# EAGLE board display (EAGLE 9.0.1)
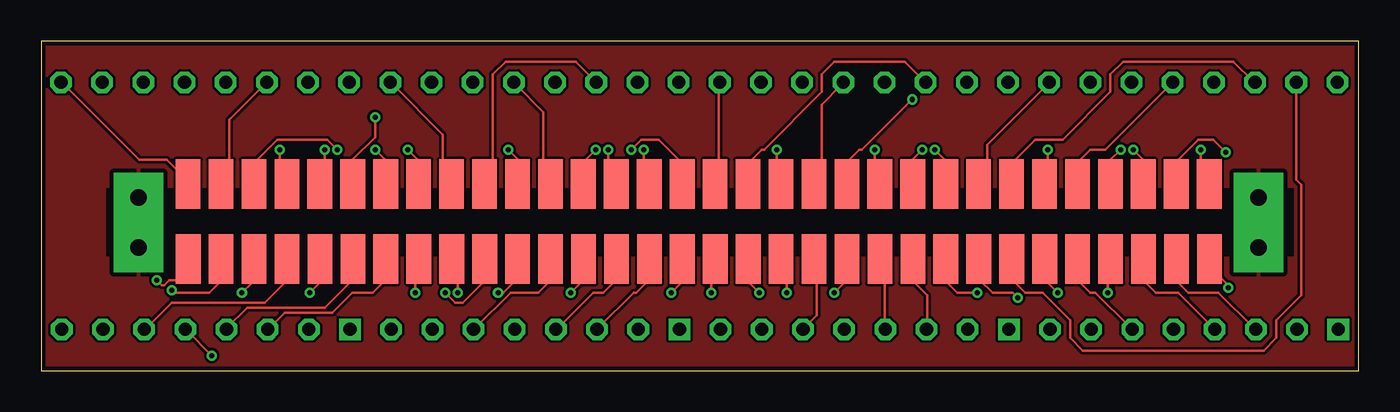
[diagram p0: board, top side]
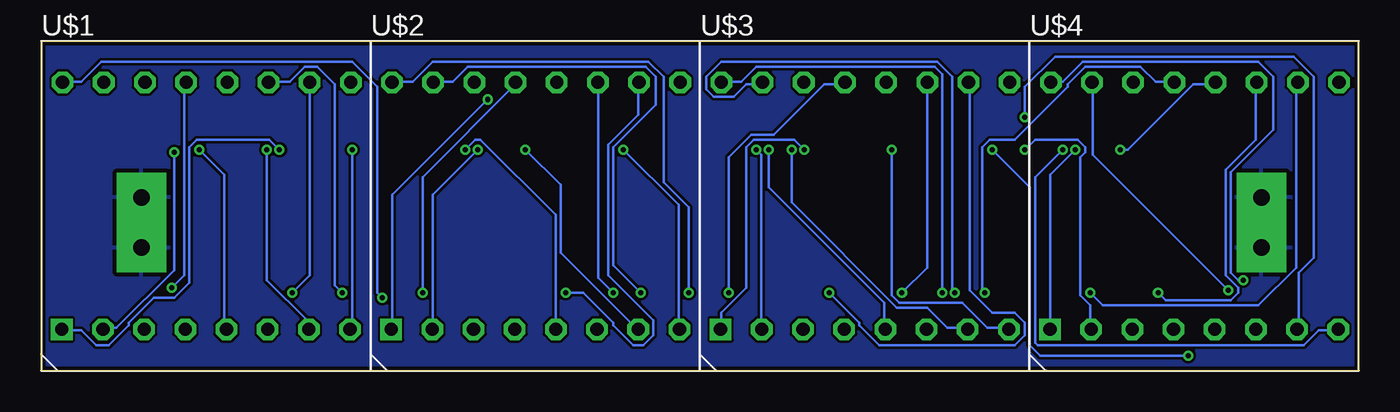
[diagram p1: board, bottom side, seen from below]

Size 80 x 20 mm. Coordinates in mm from the lower left corner, seen from the top.
Outline: 0,0 80,0 80,20 0,20 0,0
Copper layers (1*16): Top 0.035mm / dielectric 1.5mm / Bottom 0.035mm
Design rules "SeeedStudio_2layer_DRU_no_angle_20140221": minimum track width 6mil, minimum drill 12mil, track to track 6mil, track to pad 6mil, pad to pad 6mil, via to via 6mil, smd to smd 0mil, copper to edge 10mil, drill to drill 10mil, minimum pad ring 10mil, minimum via ring 6mil, stop-mask expansion 2mil, vias tented up to drill 100mil, thermal gap 10mil
tRestrict: area 4,7 to 76,11

## Footprints (pad centres in the part's own frame; a part is rotated, then mirrored left to right if it is on the bottom)
MATRIX_8X8_20MM = drill 0.8 square: P$1 1.25,2.5 | drill 0.8 octagon: P$2 3.75,2.5; P$3 6.25,2.5; P$4 8.75,2.5; P$5 11.25,2.5; P$6 13.75,2.5; P$7 16.25,2.5; P$8 18.75,2.5; P$9 18.8,17.5; P$10 16.3,17.5; P$11 13.8,17.5; P$12 11.3,17.5; P$13 8.8,17.5; P$14 6.3,17.5; P$15 3.8,17.5; P$16 1.3,17.5
ONE_SIDED = drill 1 pad 3 square: GND@1 1.564,-1.501; GND@2 69.564,-1.501; GND@3 1.564,1.547; GND@4 69.564,1.547 | smd 1.5 x 3: P$1 4.564,-2.317; P$2 6.564,-2.317; P$3 8.564,-2.317; P$4 10.564,-2.317; P$5 12.564,-2.317; P$6 14.564,-2.317; P$7 16.564,-2.317; P$8 18.564,-2.317; P$9 20.564,-2.317; P$10 22.564,-2.317; P$11 24.564,-2.317; P$12 26.564,-2.317; P$13 28.564,-2.317; P$14 30.564,-2.317; P$15 32.564,-2.317; P$16 34.564,-2.317; P$17 36.564,-2.317; P$18 38.564,-2.317; P$19 40.564,-2.317; P$20 42.564,-2.317; P$21 44.564,-2.317; P$22 46.564,-2.317; P$23 48.564,-2.317; P$24 50.564,-2.317; P$25 52.564,-2.317; P$26 54.564,-2.317; P$27 56.564,-2.317; P$28 58.564,-2.317; P$29 60.564,-2.317; P$30 62.564,-2.317; P$31 64.564,-2.317; P$32 66.564,-2.317; P$33 66.556,2.236; P$34 64.556,2.236; P$35 62.556,2.236; P$36 60.556,2.236; P$37 58.556,2.236; P$38 56.556,2.236; P$39 54.556,2.236; P$40 52.556,2.236; P$41 50.556,2.236; P$42 48.556,2.236; P$43 46.556,2.236; P$44 44.556,2.236; P$45 42.556,2.236; P$46 40.556,2.236; P$47 38.556,2.236; P$48 36.556,2.236; P$49 34.556,2.236; P$50 32.556,2.236; P$51 30.556,2.236; P$52 28.556,2.236; P$53 26.556,2.236; P$54 24.556,2.236; P$55 22.556,2.236; P$56 20.556,2.236; P$57 18.556,2.236; P$58 16.556,2.236; P$59 14.556,2.236; P$60 12.556,2.236; P$61 10.556,2.236; P$62 8.556,2.236; P$63 6.556,2.236; P$64 4.556,2.236

## Placement (x,y rotation side)
U$1  LED_8X8_MATRIX07088BH  [MATRIX_8X8_20MM]  80,0 0 bottom
U$2  LED_8X8_MATRIX07088BH  [MATRIX_8X8_20MM]  60,0 0 bottom
U$3  LED_8X8_MATRIX07088BH  [MATRIX_8X8_20MM]  40,0 0 bottom
U$4  LED_8X8_MATRIX07088BH  [MATRIX_8X8_20MM]  20,0 0 bottom
U$5  ANGLE_BOARD_CONNECTORONE_SIDED  [ONE_SIDED]  75.48,9.01 180 top

## Library data of the parts
U$1-U$4 = LED
U$5 = interboard

## Nets
GND: U$5.GND@1 U$5.GND@2 U$5.GND@3 U$5.GND@4
M1C1: U$1.P$13 U$5.P$64
M1C2: U$1.P$3 U$5.P$63
M1C3: U$1.P$4 U$5.P$62
M1C4: U$1.P$10 U$5.P$61
M1C5: U$1.P$6 U$5.P$60
M1C6: U$1.P$11 U$5.P$59
M1C7: U$1.P$15 U$5.P$58
M1C8: U$1.P$16 U$5.P$57
M1R1: U$1.P$5 U$5.P$1
M1R2: U$1.P$2 U$5.P$2
M1R3: U$1.P$7 U$5.P$3
M1R4: U$1.P$1 U$5.P$4
M1R5: U$1.P$12 U$5.P$5
M1R6: U$1.P$8 U$5.P$6
M1R7: U$1.P$14 U$5.P$7
M1R8: U$1.P$9 U$5.P$8
M2C1: U$2.P$13 U$5.P$56
M2C2: U$2.P$3 U$5.P$55
M2C3: U$2.P$4 U$5.P$54
M2C4: U$2.P$10 U$5.P$53
M2C5: U$2.P$6 U$5.P$52
M2C6: U$2.P$11 U$5.P$51
M2C7: U$2.P$15 U$5.P$50
M2C8: U$2.P$16 U$5.P$49
M2R1: U$2.P$5 U$5.P$9
M2R2: U$2.P$2 U$5.P$10
M2R3: U$2.P$7 U$5.P$11
M2R4: U$2.P$1 U$5.P$12
M2R5: U$2.P$12 U$5.P$13
M2R6: U$2.P$8 U$5.P$14
M2R7: U$2.P$14 U$5.P$15
M2R8: U$2.P$9 U$5.P$16
M3C1: U$3.P$13 U$5.P$48
M3C2: U$3.P$3 U$5.P$47
M3C3: U$3.P$4 U$5.P$46
M3C4: U$3.P$10 U$5.P$45
M3C5: U$3.P$6 U$5.P$44
M3C6: U$3.P$11 U$5.P$43
M3C7: U$3.P$15 U$5.P$42
M3C8: U$3.P$16 U$5.P$41
M3R1: U$3.P$5 U$5.P$17
M3R2: U$3.P$2 U$5.P$18
M3R3: U$3.P$7 U$5.P$19
M3R4: U$3.P$1 U$5.P$20
M3R5: U$3.P$12 U$5.P$21
M3R6: U$3.P$8 U$5.P$22
M3R7: U$3.P$14 U$5.P$23
M3R8: U$3.P$9 U$5.P$24
M4C1: U$4.P$13 U$5.P$40
M4C2: U$4.P$3 U$5.P$39
M4C3: U$4.P$4 U$5.P$38
M4C4: U$4.P$10 U$5.P$37
M4C5: U$4.P$6 U$5.P$36
M4C6: U$4.P$11 U$5.P$35
M4C7: U$4.P$15 U$5.P$34
M4C8: U$4.P$16 U$5.P$33
M4R1: U$4.P$5 U$5.P$25
M4R2: U$4.P$2 U$5.P$26
M4R3: U$4.P$7 U$5.P$27
M4R4: U$4.P$1 U$5.P$28
M4R5: U$4.P$12 U$5.P$29
M4R6: U$4.P$8 U$5.P$30
M4R7: U$4.P$14 U$5.P$31
M4R8: U$4.P$9 U$5.P$32

## Tracks (layer width: path | path; a pad name or v marks a point on that pad's centre or on a via)
GND
  pour Bottom: 0,0 80,0 80,20 0,20
  pour Top: 0,0 80,0 80,20 0,20
M1C1  (via drill 0.3)
  Top 0.152: v72.08,5.03 72.08,5.18 71.02,6.25 71.02,6.71 U$5.P$64
  Bottom 0.152: v72.08,5.03 71.32,5.79 71.32,17.37 U$1.P$13
M1C2
  Top 0.152: U$1.P$3 73.61,2.59 71.48,4.72 69.65,4.72 69.04,5.33 69.04,6.71 U$5.P$63
M1C3
  Top 0.152: U$1.P$4 71.17,2.59 69.04,4.72 67.67,4.72 67.06,5.33 67.06,6.71 U$5.P$62
M1C4  (via drill 0.3)
  Top 0.152: v64.77,4.72 64.77,6.55 64.92,6.71 U$5.P$61
  Bottom 0.152: v64.77,4.72 63.7,5.79 63.7,17.37 U$1.P$10
M1C5
  Top 0.152: U$1.P$6 66.14,2.59 64.01,4.72 63.7,4.72 62.94,5.49 62.94,6.71 U$5.P$60
M1C6  (via drill 0.3)
  Top 0.152: v61.72,4.72 60.96,5.49 60.96,6.71 U$5.P$59
  Bottom 0.152: v61.72,4.72 62.18,5.18 62.18,17.37 63.25,18.44 64.01,18.44 64.92,17.53 66.14,17.53 U$1.P$11
M1C7
  Top 0.152: U$1.P$15 76.2,11.58 76.5,11.28 76.5,4.57 74.98,3.05 74.98,1.98 74.22,1.22 63.25,1.22 62.48,1.98 62.48,3.05 60.81,4.72 59.74,4.72 58.98,5.49 58.98,6.71 U$5.P$58
M1C8  (via drill 0.3)
  Top 0.152: v59.28,4.42 58.98,4.72 57.76,4.72 57,5.49 57,6.71 U$5.P$57
  Bottom 0.152: v59.28,4.42 59.59,4.72 59.59,17.22 61.11,18.75 76.35,18.75 77.57,17.53 78.64,17.53 U$1.P$16
M1R1  (via drill 0.3)
  Top 0.152: v70.41,13.41 70.41,11.89 70.87,11.43 U$5.P$1
  Bottom 0.152: v70.41,13.41 68.89,11.89 68.89,2.59 U$1.P$5
M1R2  (via drill 0.3)
  Top 0.152: v71.93,13.26 71.17,14.02 70.26,14.02 69.04,12.8 69.04,11.43 U$5.P$2
  Bottom 0.152: v71.93,13.26 71.93,6.1 75.44,2.59 76.2,2.59 U$1.P$2
M1R3  (via drill 0.3)
  Top 0.152: v66.29,13.41 66.9,12.8 66.9,11.43 U$5.P$3
  Bottom 0.152: v66.29,13.41 66.29,5.49 63.86,3.05 63.86,2.59 U$1.P$7
M1R4  (via drill 0.3)
  Top 0.152: v65.53,13.41 64.92,12.8 64.92,11.43 U$5.P$4
  Bottom 0.152: v65.53,13.41 66.14,14.02 70.56,14.02 71.02,13.56 71.02,5.33 71.93,4.42 73.15,4.42 74.68,2.9 74.68,2.74 75.89,1.52 76.66,1.52 77.57,2.44 78.64,2.44 U$1.P$1
M1R5
  Top 0.152: U$1.P$12 68.58,17.37 64.62,13.41 63.7,13.41 62.94,12.65 62.94,11.43 U$5.P$5
M1R6  (via drill 0.3)
  Top 0.152: v61.11,13.41 61.11,11.58 60.96,11.43 U$5.P$6
  Bottom 0.152: v61.11,13.41 61.11,2.59 U$1.P$8
M1R7
  Top 0.152: U$1.P$14 73.61,17.53 72.39,18.75 65.68,18.75 64.92,17.98 64.92,16.92 62.03,14.02 60.35,14.02 58.98,12.65 58.98,11.43 U$5.P$7
M1R8
  Top 0.152: U$1.P$9 61.11,17.37 57.45,13.72 57.45,11.89 57,11.43 U$5.P$8
M2C1  (via drill 0.3)
  Top 0.152: v56.84,4.72 55.63,4.72 55.02,5.33 55.02,6.71 U$5.P$56
  Bottom 0.152: v56.84,4.72 56.84,11.73 51.21,17.37 U$2.P$13
M2C2
  Top 0.152: U$2.P$3 53.8,2.59 53.8,4.57 53.03,5.33 53.03,6.71 U$5.P$55
M2C3
  Top 0.152: U$2.P$4 51.21,2.59 51.21,6.55 51.05,6.71 U$5.P$54
M2C4  (via drill 0.3)
  Top 0.152: v48.16,4.72 48.92,5.49 48.92,6.71 U$5.P$53
  Bottom 0.152: v48.16,4.72 47.09,4.72 45.26,2.9 45.26,2.74 44.04,1.52 43.43,1.52 42.82,2.13 42.82,3.05 45.57,5.79 45.57,13.72 43.74,15.54 43.74,17.37 U$2.P$10
M2C5
  Top 0.152: U$2.P$6 46.33,2.59 47.09,3.35 47.09,6.55 46.94,6.71 U$5.P$52
M2C6  (via drill 0.3)
  Top 0.152: v45.26,4.72 45.26,6.4 44.96,6.71 U$5.P$51
  Bottom 0.152: v45.26,4.72 46.18,5.64 46.18,17.37 U$2.P$11
M2C7  (via drill 0.3)
  Top 0.152: v43.59,4.72 42.98,5.33 42.98,6.71 U$5.P$50
  Bottom 0.152: v43.59,4.72 45.26,6.4 45.26,13.56 42.67,16.15 42.67,17.83 43.28,18.44 54.1,18.44 55.02,17.53 56.08,17.53 U$2.P$15
M2C8  (via drill 0.3)
  Top 0.152: v40.69,4.72 40.69,6.55 40.84,6.71 U$5.P$49
  Bottom 0.152: v40.69,4.72 40.69,9.91 42.22,11.43 42.22,17.83 43.13,18.75 56.24,18.75 57.45,17.53 58.67,17.53 U$2.P$16
M2R1  (via drill 0.3)
  Top 0.152: v54.25,13.41 54.86,12.8 54.86,11.43 U$5.P$9
  Bottom 0.152: v54.25,13.41 53.65,14.02 53.34,14.02 48.77,9.45 48.77,2.59 U$2.P$5
M2R2  (via drill 0.3)
  Top 0.152: v53.49,13.41 52.88,12.8 52.88,11.43 U$5.P$10
  Bottom 0.152: v53.49,13.41 56.24,10.67 56.24,2.59 U$2.P$2
M2R3  (via drill 0.3)
  Top 0.152: v50.6,13.41 50.6,11.73 50.9,11.43 U$5.P$11
  Bottom 0.152: v50.6,13.41 48.46,11.28 48.46,7.16 43.89,2.59 U$2.P$7
M2R4  (via drill 0.3)
  Top 0.152: v52.88,16.46 49.84,13.41 49.68,13.41 48.92,12.65 48.92,11.43 U$5.P$12
  Bottom 0.152: v52.88,16.46 58.67,10.67 58.67,2.59 U$2.P$1
M2R5
  Top 0.152: U$2.P$12 48.62,17.37 47.4,16.15 47.4,11.89 46.94,11.43 U$5.P$13
M2R6  (via drill 0.3)
  Top 0.152: v44.65,13.41 44.65,11.58 44.81,11.43 U$5.P$14
  Bottom 0.152: v44.65,13.41 41.3,10.06 41.3,2.59 U$2.P$8
M2R7
  Top 0.152: U$2.P$14 53.65,17.53 52.43,18.75 48.16,18.75 47.4,17.98 47.4,16.92 43.89,13.41 43.74,13.41 42.98,12.65 42.98,11.43 U$5.P$15
M2R8
  Top 0.152: U$2.P$9 41.15,17.37 41.15,11.58 41,11.43 U$5.P$16
M3C1  (via drill 0.3)
  Top 0.152: v38.25,4.72 38.86,5.33 38.86,6.71 U$5.P$48
  Bottom 0.152: v38.25,4.72 38.25,12.95 36.88,14.33 35.51,14.33 32.46,17.37 31.24,17.37 U$3.P$13
M3C2
  Top 0.152: U$3.P$3 33.83,2.59 35.97,4.72 36.12,4.72 36.88,5.49 36.88,6.71 U$5.P$47
M3C3
  Top 0.152: U$3.P$4 31.39,2.59 33.53,4.72 34.14,4.72 34.9,5.49 34.9,6.71 U$5.P$46
M3C4  (via drill 0.3)
  Top 0.152: v32.16,4.72 32.92,5.49 32.92,6.71 U$5.P$45
  Bottom 0.152: v32.16,4.72 30.33,2.9 30.33,2.74 29.11,1.52 20.88,1.52 20.27,2.13 20.27,2.9 20.88,3.5 22.25,3.5 23.62,4.88 23.62,17.37 U$3.P$10
M3C5
  Top 0.152: U$3.P$6 26.36,2.59 28.5,4.72 30.18,4.72 30.79,5.33 30.79,6.71 U$5.P$44
M3C6  (via drill 0.3)
  Top 0.152: v27.74,4.72 28.04,4.72 28.8,5.49 28.8,6.71 U$5.P$43
  Bottom 0.152: v27.74,4.72 26.21,6.25 26.21,17.37 U$3.P$11
M3C7  (via drill 0.3)
  Top 0.152: v24.54,4.72 25.15,4.12 25.6,4.12 26.82,5.33 26.82,6.71 U$5.P$42
  Bottom 0.152: v24.54,4.72 24.69,4.88 24.69,17.83 25.6,18.75 38.71,18.75 39.62,17.83 39.62,17.07 39.17,16.61 37.95,16.61 37.19,17.37 36.27,17.37 U$3.P$15
M3C8  (via drill 0.3)
  Top 0.152: v25.3,4.72 25.3,6.4 24.99,6.71 U$5.P$41
  Bottom 0.152: v25.3,4.72 25.3,17.98 25.76,18.44 36.58,18.44 37.49,17.53 38.56,17.53 U$3.P$16
M3R1  (via drill 0.3)
  Top 0.152: v35.81,13.41 36.42,14.02 37.49,14.02 38.86,12.65 38.86,11.43 U$5.P$17
  Bottom 0.152: v35.81,13.41 35.81,11.12 28.8,4.12 28.8,2.59 U$3.P$5
M3R2  (via drill 0.3)
  Top 0.152: v36.58,13.41 36.58,11.73 36.88,11.43 U$5.P$18
  Bottom 0.152: v36.58,13.41 36.27,13.11 36.27,2.59 U$3.P$2
M3R3  (via drill 0.3)
  Top 0.152: v34.44,13.41 34.44,11.89 34.9,11.43 U$5.P$19
  Bottom 0.152: v34.44,13.41 34.44,10.21 28.04,3.81 26.21,3.81 24.99,2.59 23.77,2.59 U$3.P$7
M3R4  (via drill 0.3)
  Top 0.152: v33.68,13.41 32.92,12.65 32.92,11.43 U$5.P$20
  Bottom 0.152: v33.68,13.41 34.29,14.02 36.73,14.02 37.19,13.56 37.19,5.03 38.71,3.5 38.71,2.59 U$3.P$1
M3R5
  Top 0.152: U$3.P$12 28.8,17.37 30.48,15.7 30.48,11.73 30.79,11.43 U$5.P$21
M3R6  (via drill 0.3)
  Top 0.152: v28.35,13.41 28.96,12.8 28.96,11.43 U$5.P$22
  Bottom 0.152: v28.35,13.41 28.35,4.57 27.89,4.12 24.08,4.12 22.55,2.59 21.34,2.59 U$3.P$8
M3R7
  Top 0.152: U$3.P$14 33.68,17.53 32.46,18.75 28.19,18.75 27.43,17.98 27.43,11.89 26.98,11.43 U$5.P$23
M3R8
  Top 0.152: U$3.P$9 21.34,17.37 24.38,14.33 24.38,11.89 24.84,11.43 U$5.P$24
M4C1  (via drill 0.3)
  Top 0.152: v22.71,4.72 22.71,6.55 22.86,6.71 U$5.P$40
  Bottom 0.152: v22.71,4.72 22.86,4.88 22.86,13.56 22.4,14.02 20.88,14.02 17.68,17.22 17.68,17.37 16.61,18.44 13.26,18.44 12.34,17.53 11.28,17.53 U$4.P$13
M4C2
  Top 0.152: U$4.P$3 13.87,2.59 14.78,3.5 17.68,3.5 18.9,4.72 20.12,4.72 20.88,5.49 20.88,6.71 U$5.P$39
M4C3
  Top 0.152: U$4.P$4 11.28,2.59 12.5,3.81 17.22,3.81 18.9,5.49 18.9,6.71 U$5.P$38
M4C4  (via drill 0.3)
  Top 0.152: v16.31,4.72 16.92,5.33 16.92,6.71 U$5.P$37
  Bottom 0.152: v16.31,4.72 15.54,3.96 6.1,3.96 3.81,6.25 3.81,17.37 U$4.P$10
M4C5
  Top 0.152: U$4.P$6 6.4,2.59 7.92,4.12 13.56,4.12 14.78,5.33 14.78,6.71 U$5.P$36
M4C6  (via drill 0.3)
  Top 0.152: v12.19,4.72 12.8,5.33 12.8,6.71 U$5.P$35
  Bottom 0.152: v12.19,4.72 11.73,4.27 7.77,4.27 7.32,4.72 7.32,5.03 8.08,5.79 8.08,12.19 6.25,14.02 6.25,17.37 U$4.P$11
M4C7  (via drill 0.3)
  Top 0.152: v7.92,4.88 8.08,4.72 10.21,4.72 10.82,5.33 10.82,6.71 U$5.P$34
  Bottom 0.152: v7.92,4.88 16.15,13.11 16.15,17.37 U$4.P$15
M4C8  (via drill 0.3)
  Top 0.152: v7.01,5.49 7.32,5.18 7.47,5.18 7.77,5.49 8.23,5.49 8.84,6.1 8.84,6.71 U$5.P$33
  Bottom 0.152: v7.01,5.49 7.32,5.49 7.77,5.94 7.77,12.04 5.18,14.63 5.18,17.83 6.1,18.75 16.76,18.75 17.98,17.53 18.59,17.53 U$4.P$16
M4R1  (via drill 0.3)
  Top 0.152: v10.36,0.91 8.84,2.44 U$4.P$5 | v22.25,13.41 22.86,12.8 22.86,11.43 U$5.P$25
  Bottom 0.152: v10.36,0.91 19.36,0.91 19.96,1.52 19.96,11.12 v22.25,13.41
M4R2  (via drill 0.3)
  Top 0.152: v20.27,13.41 20.88,12.8 20.88,11.43 U$5.P$26
  Bottom 0.152: v20.27,13.41 19.66,14.02 17.07,14.02 16.61,13.56 16.61,13.26 16.92,12.95 16.92,4.57 16.31,3.96 16.31,2.59 U$4.P$2
M4R3  (via drill 0.3)
  Top 0.152: v20.27,15.39 20.27,14.17 18.9,12.8 18.9,11.43 U$5.P$27
  Bottom 0.152: v20.27,15.39 20.27,17.22 18.44,19.05 3.96,19.05 2.74,17.83 2.74,6.86 3.66,5.94 3.66,2.59 U$4.P$7
M4R4  (via drill 0.3)
  Top 0.152: v17.22,13.41 17.22,11.58 17.07,11.43 U$5.P$28
  Bottom 0.152: v17.22,13.41 18.75,11.89 18.75,2.59 U$4.P$1
M4R5  (via drill 0.3)
  Top 0.152: v14.48,13.41 14.48,11.73 14.78,11.43 U$5.P$29
  Bottom 0.152: v14.48,13.41 14.02,13.41 10.06,17.37 8.84,17.37 U$4.P$12
M4R6  (via drill 0.3)
  Top 0.152: v17.98,13.41 17.37,14.02 14.33,14.02 12.95,12.65 12.95,11.43 U$5.P$30
  Bottom 0.152: v17.98,13.41 19.66,11.73 19.66,1.68 19.51,1.52 3.35,1.52 2.44,2.44 1.37,2.44 U$4.P$8
M4R7
  Top 0.152: U$4.P$14 13.56,17.37 11.43,15.24 11.43,11.89 10.97,11.43 U$5.P$31
M4R8
  Top 0.152: U$4.P$9 1.22,17.37 1.52,17.07 1.68,17.07 5.94,12.8 7.62,12.8 8.99,11.43 U$5.P$32